# Altium PCB pull_test.PcbDoc
Units mm, origin at the board's own origin, x right, y up, seen from the top; angles counter-clockwise.
Board outline 80 x 60.1 mm, 2 copper layers (Top Layer, Bottom Layer); 72 components, 42 nets, 316 pads, 79 vias.
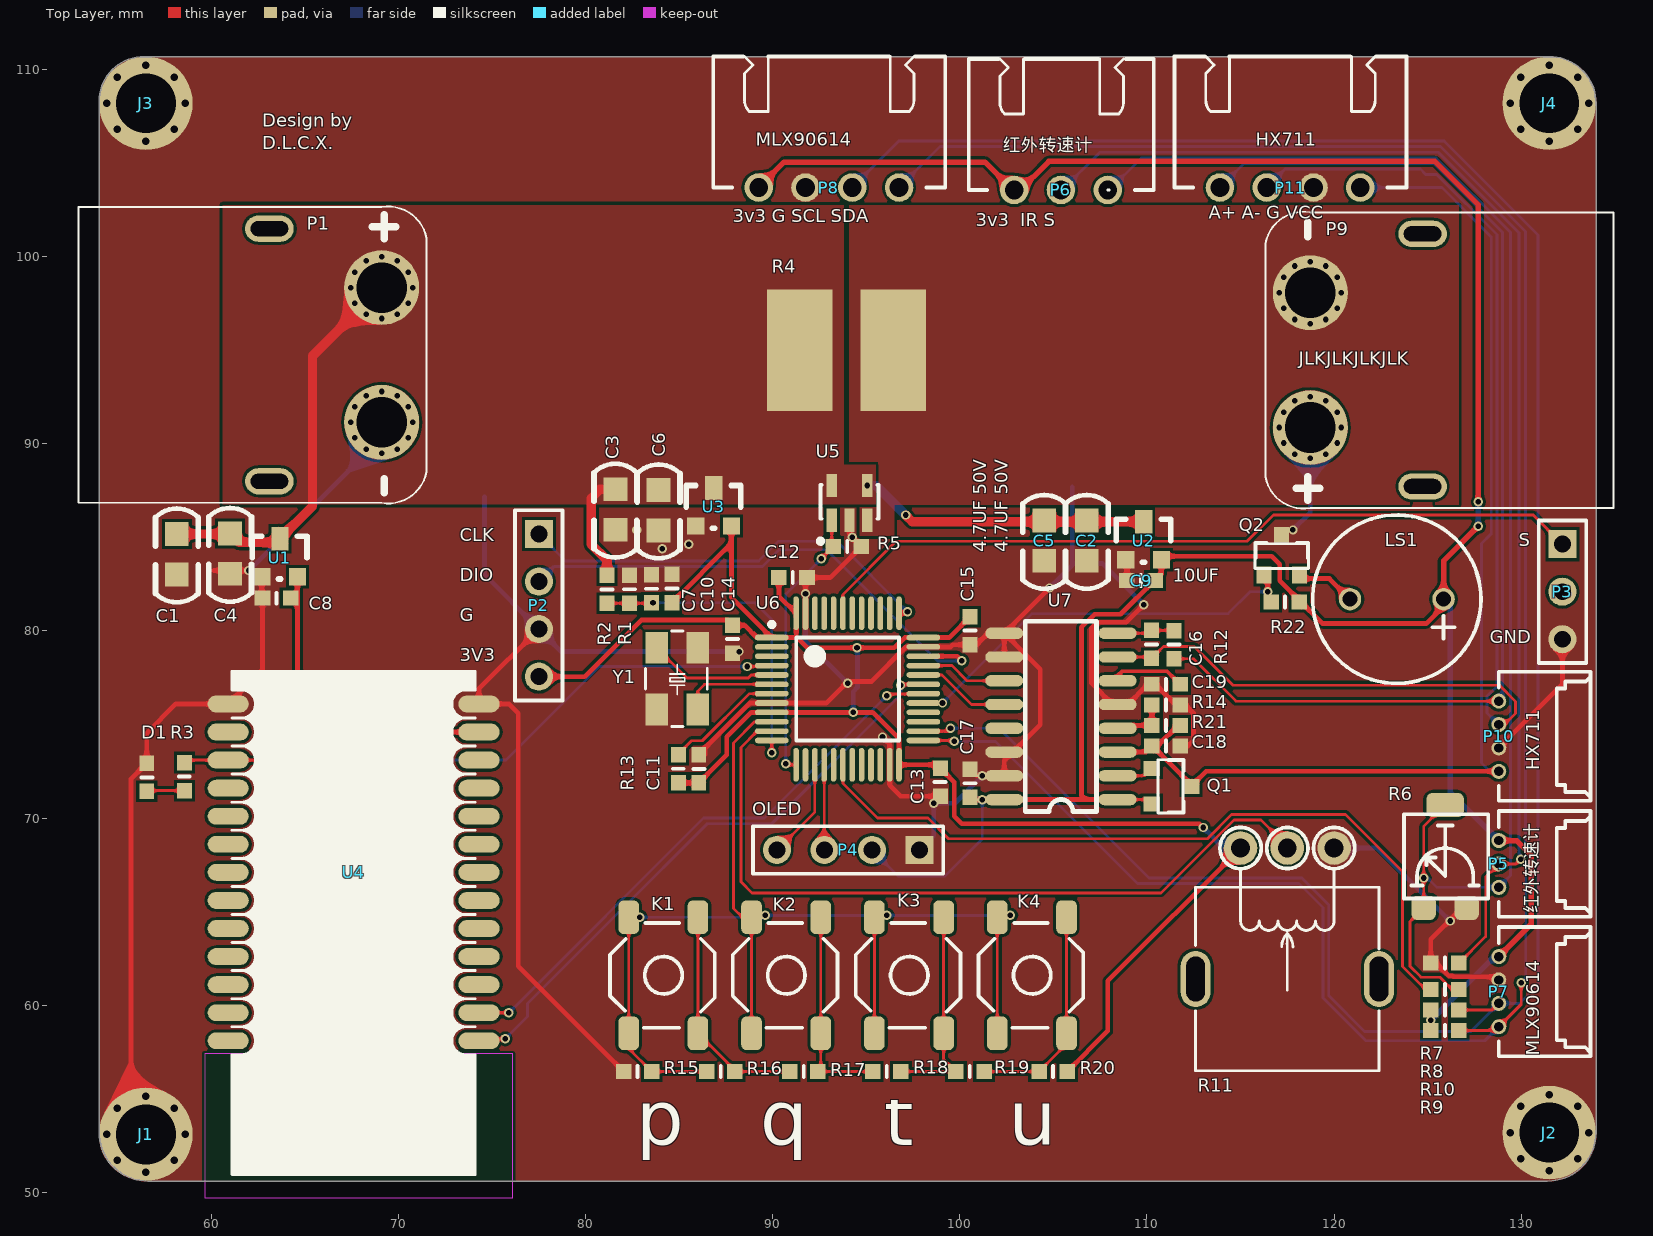
[diagram p0: Top Layer view]
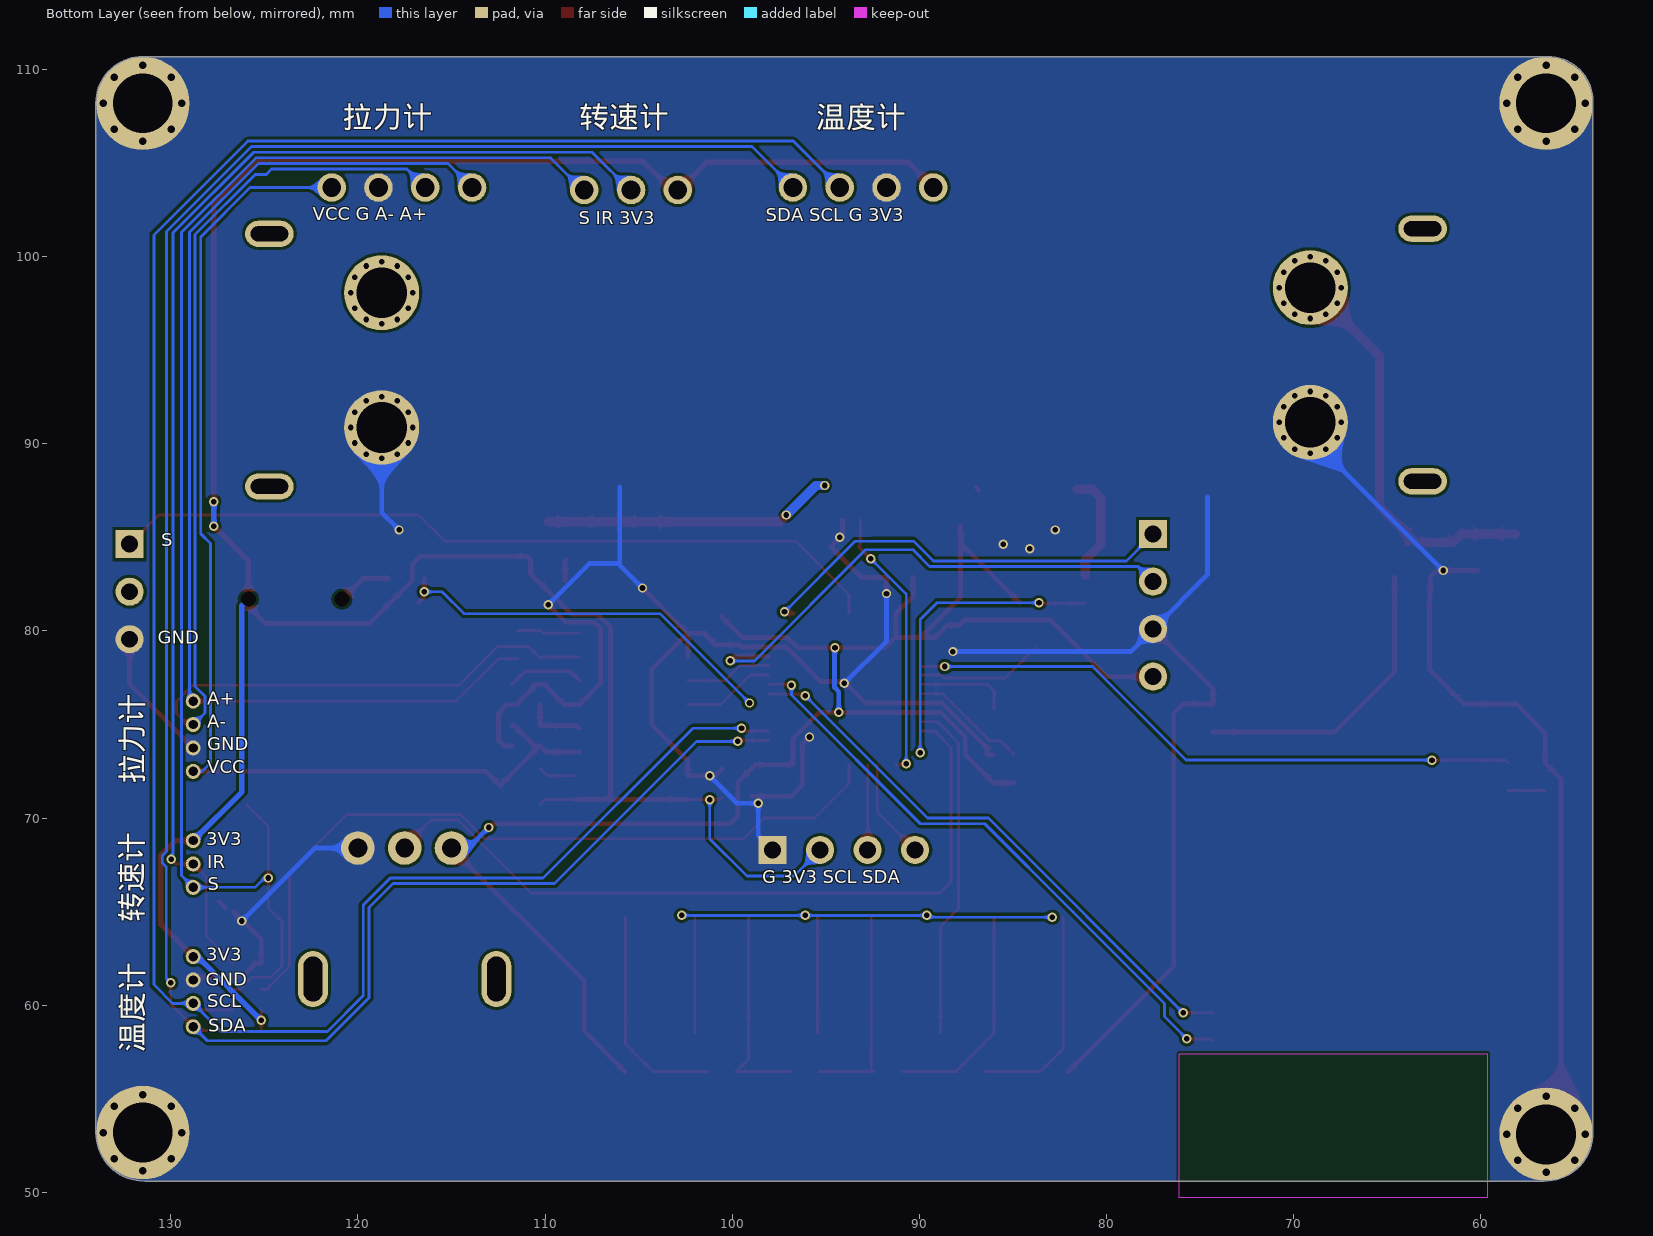
[diagram p1: Bottom Layer view, seen from below]
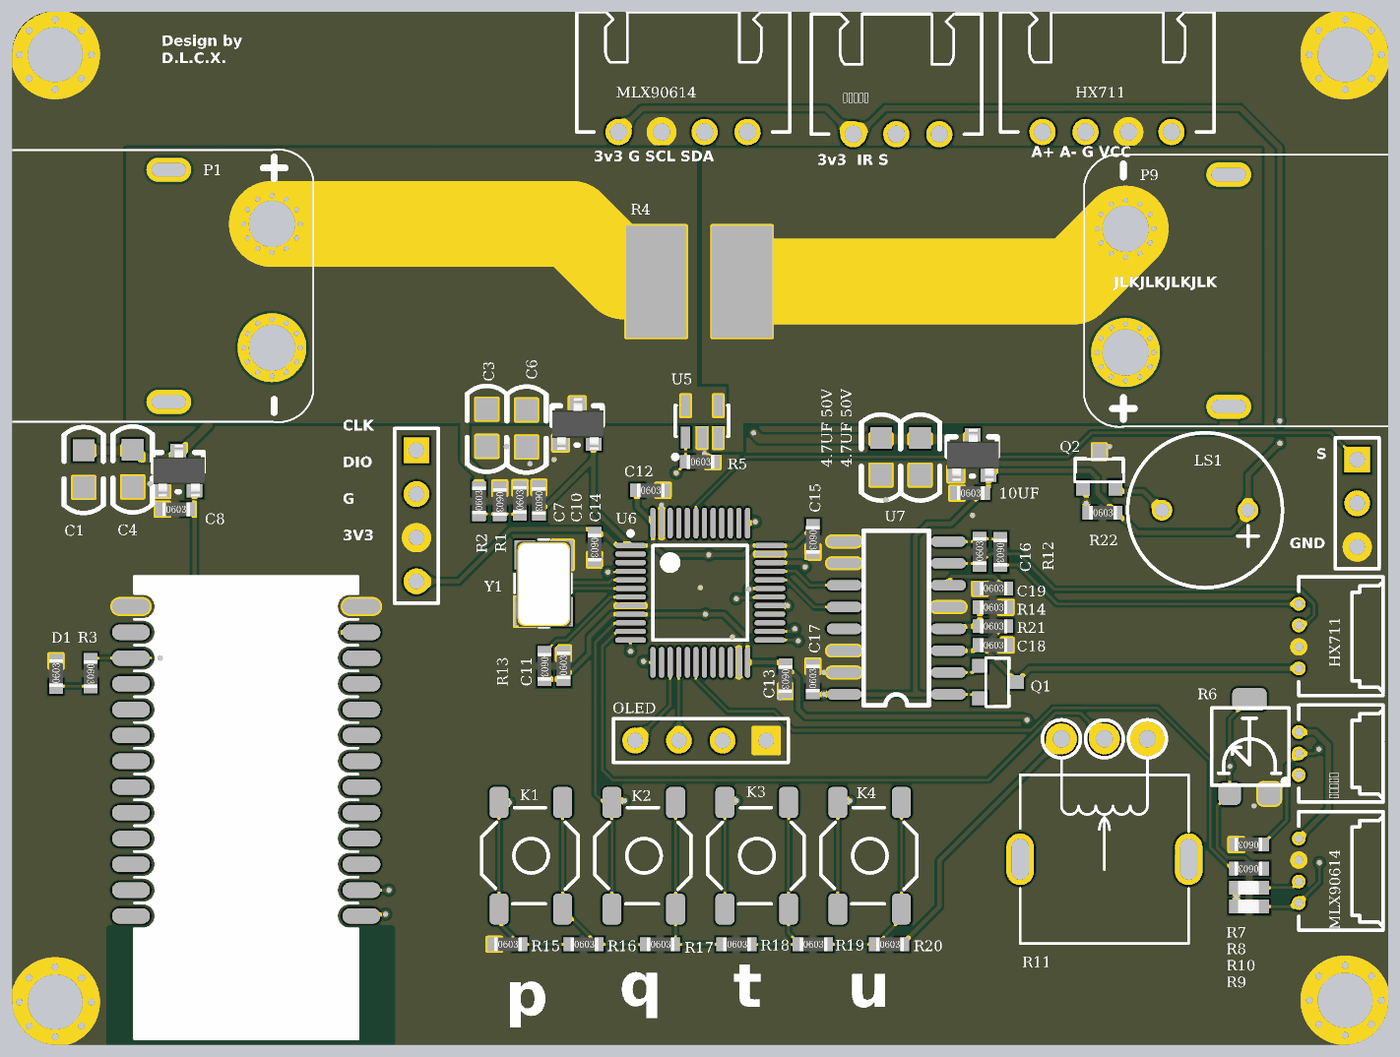
[diagram p2: 3D render of the assembled board from above, using the file's embedded part models]

## Layer stack, top to bottom
Top Solder: solder mask 0.0102, Solder Resist, Dk 3.5
Top Layer: signal copper 0.0356
Dielectric 1: dielectric 0.32, FR-4, Dk 4.8
Bottom Layer: signal copper 0.0356
Bottom Solder: solder mask 0.0102, Solder Resist, Dk 3.5

## Board outline
56.4,110.7 131.5,110.7 cw(c131.5,108.2) 134,108.2 134,53.2 cw(c131.4,53.2) 131.4,50.6 56.6,50.6 cw(c56.6,53.2) 54,53.2 54,108.3 cw(c56.4,108.3)

## Design rules (kind name [scope] priority, off if disabled: settings)
Clearance [All] p1: gap=0.15 ignorepadtopadclearanceinfootprint=FALSE
ComponentClearance [All] p1: gap=0 collisioncheckmode=3 verticalgap=0 showdistances=FALSE
PolygonConnect [All] p1: connectstyle=Direct reliefconductorwidth=0.254 reliefentries=4 polygonreliefangle="90 Angle" airgapwidth=0.254
RoutingVias [All] p1: holewidth=0.711 width=1.27 viastyle="Through Hole" minholewidth=0.3 minwidth=0.5 maxholewidth=0.711 maxwidth=1.27
ShortCircuit [All] p1: allowed=TRUE
SolderMaskExpansion [All] p1: expansion=0.102
UnRoutedNet [All] p1: checkbadconnections=TRUE
Width [All] p1: maxlimit=5 minlimit=0.15 preferedwidth=0.15
27 further rules are at their usual default settings.

## Components (designator, comment, footprint, x,y, rotation, side; value= is the part's Value field where it differs from the comment)
C1 "4.7UF 50V" 0805C 58.027,83.021 r90 top
C2 "4.7UF 50V" 0805C 106.655,83.747 r90 top
C3 "4.7UF 50V" 0805C 81.465,85.412 r90 top
C4 "4.7UF 50V" 0805C 60.873,83.056 r90 top
C5 "4.7UF 50V" 0805C 104.384,83.747 r90 top
C6 "4.7UF 50V" 0805C 83.773,85.372 r90 top
C7 "0.1UF" 0603 83.568,82.177 r90 top
C8 "10UF" 0603 63.4,81.7 r0 top
C9 "10UF" 0603 109.6,82.64 r0 top
C10 "10UF" 0603 84.571,82.352 r270 top
C11 "0.1UF" 0603 86.1,72.55 r90 top
C12 "0.1UF" 0603 91,82.8 r0 top
C13 "0.1UF" 0603 98.9,72 r270 top
C14 "0.1UF" 0603 87.8,79.65 r270 top
C15 "0.1UF" 0603 100.5,80.1 r270 top
C16 "0.1UF" 0603 110.3,79.2 r90 top
C17 "1UF" 0603 100.6,71.792 r90 top
C18 "1UF" 0603 110.935,73.8 r0 top
C19 "1UF" 0603 110.935,77.1 r0 top
D1 "LED2" 0603 56.6,72.1 r90 top
J1 "PAD" PAD 56.5,53.1 r0 top
J2 "PAD" PAD 131.5,53.194 r0 top
J3 "PAD" PAD 56.5,108.2 r0 top
J4 "PAD" PAD 131.5,108.2 r0 top
K1 "BUTTON" 金属轻触开关 86,58.5 r90 top locked
K2 "BUTTON" 金属轻触开关 92.567,58.5 r90 top locked
K3 "BUTTON" 金属轻触开关 99.133,58.5 r90 top locked
K4 "BUTTON" 金属轻触开关 105.7,58.5 r90 top locked
LS1 "Speaker" 0905蜂鸣器 123.35,81.7 r180 top locked
P1 "Header 2" XT60-90 69.1,94.75 r270 top locked
P2 "SWI" HDR1X4 77.5,85.18 r270 top
P3 "电调" HDR1X3 132.2,84.64 r270 top
P4 "OLED" HDR1X4 97.84,68.3 r180 top
P5 "红外转速计" 1.25弯针-3p 128.8,68.8 r270 top locked
P6 "红外转速计" XH2.54-3P 100.868,103.568 r0 top
P7 "MLX90614" 1.25弯针-4p 128.8,62.6 r270 top locked
P8 "MLX90614" XH2.54-4P 87.218,103.7 r0 top
P9 "Header 2" XT60-90 118.73,94.474 r90 top locked
P10 "HX711" 1.25弯针-4p 128.8,76.25 r270 top locked
P11 "HX711" XH2.54-4P 111.868,103.7 r0 top
Q1 "S8550 PNP" SOT23-3 111.255,71.7 r270 top
Q2 "S8550 PNP" SOT23-3 117.2,84 r0 top
R1 "5K" 0603 82.292,82.302 r270 top value=10K
R2 "50K" 0603 81.192,82.145 r90 top value=10K
R3 "470" 0603 58.5,72.3 r270 top value=10K
R4 "0.0005R" 2725-RES 93.933,95 r180 top value=1K
R5 "100K" 0603 93.9,84.46 r0 top value=1K
R6 "5K" 可调精密电阻 123.036,62.7 r0 top
R7 "1K" 0603 126,62.3 r180 top value=10K
R8 "1K" 0603 126,60.9 r180 top value=10K
R9 "2.2K" 0603 126,58.7 r180 top value=10K
R10 "2.2K" 0603 126,59.8 r180 top value=10K
R11 "5K" 0932立式电位器 122.4,66.3 r180 top locked
R12 "1K" 0603 111.4,79.35 r270 top value=10K
R13 "100K" 0603 84.9,72.712 r270 top
R14 "8.2K" 0603 110.935,76 r0 top value=10K
R15 "10K" 0603 82.7,56.4 r0 top
R16 "10K" 0603 87.14,56.4 r0 top
R17 "10K" 0603 91.58,56.4 r0 top
R18 "10K" 0603 96.02,56.4 r0 top
R19 "10K" 0603 100.46,56.4 r0 top
R20 "10K" 0603 104.9,56.4 r0 top
R21 "20K" 0603 110.935,74.9 r0 top value=10K
R22 "10K" 0603 117.3,81.5 r0 top
U1 "ME6203" SOT-23 62.695,82.9 r0 top
U2 "ME6203" SOT-23 108.865,83.808 r0 top
U3 "ME6203" SOT-23 85.885,85.615 r0 top
U4 "HC-06" HC06/HC05 60.9,76.1 r270 top locked
U5 "IN139 电流检测" SOT23-5 93.465,87.916 r0 top
U6 "STM32F103C8T6" STM-LQFP48_N 94,76.9 r0 top locked
U7 "HX711" SOP-16 108.431,70.99 r180 top
Y1 "XTAL" 5032晶振 83,80.1 r270 top locked

## Footprints (in the part's own frame and the unit in brackets; to place one, negate y for a bottom-side part, rotate by r counter-clockwise, add the part's x,y. Pads: shape width x height; smd on the part's side, far side on the other; paste and mask are expansions set on the pad)
1.25弯针-3p [mm]
  round 0.8 hole 0.5 paste+0: 1(0,0) 2(1.25,0) 3(2.5,0)
  silkscreen extent -1.58,0 4.08,4.9
1.25弯针-4p [mm]
  round 0.8 hole 0.5 paste+0: 1(0,0) 2(1.25,0) 3(2.5,0) 4(3.75,0)
  silkscreen extent -1.58,0 5.33,4.9
0603 [mm]
  rect 0.83x0.8 smd paste+0: 1(-0.669,0.054) 2(0.831,0.054)
  silkscreen extent 0.08,-0.25 0.08,0.35, body extent -0.67,-0.35 0.93,0.45, height 0.45
0805C [mil]
  rect 50x50 smd: 1(0,-5) 2(85,-5)
  silkscreen extent -59,-50 139,40
0905蜂鸣器 [mm]
  round 1.2 / inner round 0.5 / far side round 0.5 hole 0.8 paste+0: 1(-2.5,0) 2(2.5,0)
  silkscreen extent -4.5,-4.5 4.5,4.5
0932立式电位器 [mm]
  round 1.8 hole 1 paste+0: 1(2.4,-2.1) 2(4.9,-2.1) 3(7.4,-2.1)
  oval 1.6x3 hole 1 slot 2.4 at 90 deg paste+0: GND(0,4.9) GND(9.8,4.9)
  silkscreen extent 0,-3.2 9.8,9.8
2725-RES [mm]
  rect 3.5x6.5 smd: 1(-2.5,0) 2(2.5,0)
5032晶振 [mm] "5.0 x 3.2 x 0.9 mm"
  rect 1.7x1.2 smd: 1(1,0.8) 2(4.3,0.8) 3(4.3,3) 4(1,3)
  silkscreen extent 0.1,0.2 5.2,3.5, body extent 0.2,0.3 5.2,3.5, height 1
HC06/HC05 [mm]
  oval 0.9x2.2 smd: 1(18,13.4) 2(16.5,13.4) 3(15,13.4) 4(13.5,13.4) 5(12,13.4) 6(10.5,13.4) 7(9,13.4) 8(7.5,13.4) 9(6,13.4) 10(4.5,13.4) 11(3,13.4) 12(1.5,13.4) 13(0,13.4) 22(0,0) 23(1.5,0) 24(3,0) 25(4.5,0) 26(6,0) 27(7.5,0) 28(9,0) 29(10.5,0) 30(12,0) 31(13.5,0) 32(15,0) 33(16.5,0) 34(18,0)
  silkscreen extent -1.75,0.2 25.15,13.2
HDR1X3 [mm] "Connector; Header; 3 Position"
  rect 1.5x1.5 hole 0.9: 1(0,0)
  round 1.5 hole 0.9: 2(2.54,0) 3(5.08,0)
  silkscreen extent -1.27,-1.27 6.35,1.27
HDR1X4 [mm] "Connector; Header; 4 Position"
  rect 1.5x1.5 hole 0.9: 1(0,0)
  round 1.5 hole 0.9: 2(2.54,0) 3(5.08,0) 4(7.62,0)
  silkscreen extent -1.27,-1.27 8.89,1.27
PAD [mm]
  round 5 hole 3.2: 1(0,0)
SOP-16 [mil]
  oval 80x24 smd: 1(0,0) 2(0,-50) 3(0,-100) 4(0,-150) 5(0,-200) 6(0,-250) 7(0,-300) 8(0,-350) 9(238.5,-350) 10(238.5,-300) 11(238.5,-250) 12(238.5,-200) 13(238.5,-150) 14(238.5,-100) 15(238.5,-50) 16(238.5,0)
  silkscreen extent 44,-375 194,25
SOT23-3 [mm]
  rect 0.8x0.9 smd: 1(-0.95,-1) 2(0.95,-1) 3(0,1.1)
  silkscreen extent -1.42,-0.66 1.42,0.7
SOT23-5 [mm]
  rect 0.55x1.25 smd: 1(-0.315,-1.991) 2(0.635,-1.991) 3(1.585,-1.991) 4(1.585,-0.141) 5(-0.315,-0.141)
  silkscreen extent -1.04,-3.24 2.19,-0.12, body extent -0.85,-2.4 2.05,0.4, height 0.25
SOT-23 [mil]
  rect 36x36 smd: 1(0,0) 2(75,0)
  rect 36x50 smd: 3(38,80)
  silkscreen extent -20,-5 95,85, body extent -20,-16 98,102, height 39
STM-LQFP48_N [mm] "QFP, 48-Leads, Body 7x7mm, Pitch 0.5mm, IPC Medium Density"
  oval 1.8x0.3 smd: 1(-4.05,2.75) 2(-4.05,2.25) 3(-4.05,1.75) 4(-4.05,1.25) 5(-4.05,0.75) 6(-4.05,0.25) 7(-4.05,-0.25) 8(-4.05,-0.75) 9(-4.05,-1.25) 10(-4.05,-1.75) 11(-4.05,-2.25) 12(-4.05,-2.75) 25(4.05,-2.75) 26(4.05,-2.25) 27(4.05,-1.75) 28(4.05,-1.25) 29(4.05,-0.75) 30(4.05,-0.25) 31(4.05,0.25) 32(4.05,0.75) 33(4.05,1.25) 34(4.05,1.75) 35(4.05,2.25) 36(4.05,2.75)
  oval 0.3x1.8 smd: 13(-2.75,-4.05) 14(-2.25,-4.05) 15(-1.75,-4.05) 16(-1.25,-4.05) 17(-0.75,-4.05) 18(-0.25,-4.05) 19(0.25,-4.05) 20(0.75,-4.05) 21(1.25,-4.05) 22(1.75,-4.05) 23(2.25,-4.05) 24(2.75,-4.05) 37(2.75,4.05) 38(2.25,4.05) 39(1.75,4.05) 40(1.25,4.05) 41(0.75,4.05) 42(0.25,4.05) 43(-0.25,4.05) 44(-0.75,4.05) 45(-1.25,4.05) 46(-1.75,4.05) 47(-2.25,4.05) 48(-2.75,4.05)
  silkscreen extent -4.17,-2.75 2.75,3.57, body extent -3.5,-3.5 3.5,3.5, height 1.6
XH2.54-3P [mil]
  round 60 hole 39.37 paste+0: 1(80,0) 2(178.43,0) 3(276.85,0)
  silkscreen extent -16,0 374,276
XH2.54-4P [mil]
  round 60 hole 39.37 paste+0: 1(80,0) 1(80,0) 2(178.43,0) 3(276.85,0) 4(375.28,0)
  silkscreen extent -16,0 472,276
XT60-90 [mm]
  round 0.5 hole 0.3 mask+0: 1(-5.251,0) 1(-5.03,-0.826) 1(-5.03,0.825) 1(-4.426,-1.43) 1(-4.426,1.43) 1(-3.6,-1.651) 1(-3.6,1.651) 1(-2.775,1.43) 1(-2.775,-1.43) 1(-2.17,-0.826) 1(-2.17,0.825) 1(-1.949,0) 2(1.949,0) 2(2.17,-0.825) 2(2.17,0.826) 2(2.775,1.43) 2(2.775,-1.43) 2(3.6,-1.651) 2(3.6,1.651) 2(4.426,-1.43) 2(4.426,1.43) 2(5.03,-0.825) 2(5.03,0.826) 2(5.251,0)
  round 4 hole 2.7 mask+0: 1(-3.6,0) 2(3.6,0)
  oval 1.4x2.6 hole 0.8 slot 2 at 90 deg mask+0: 3(6.75,-6) 4(-6.75,-6)
  silkscreen extent -7.93,-16.2 7.93,2.4
可调精密电阻 [mm] "4.5*4.5*2.55"
  rrect50% 1.3x1.3 smd paste+0: 1(4.05,2.5) 3(1.75,2.5)
  rrect50% 2x1.3 smd paste+0: 2(2.9,8)
  round 0.6 on Top Overlay paste+0: ""(5,3.2)
  silkscreen extent 0.7,3 5.2,7.5, body extent 0.65,3.05 5.15,7.55, height 2.55
金属轻触开关 [mm] "4*4*1.5/3.0MM金属开关"
  rrect50% 1.8x1.1 smd paste+0: 1(0,0) 1(6.2,0) 2(0,3.7) 2(6.2,3.7)
  silkscreen extent 0.3,-0.9 5.9,4.7

## Part data
C1 C2 C3 C4 C5 C6: library part Cap, "0805 50v 4.7uf", LatestRevisionDate=17-Jul-2002, LatestRevisionNote="Re-released for DXP Platform.", PackageDescription="Radial Cap, Thru-Hole; 2 Leads; 0.3 in Pin Spacing", PackageReference=RAD-0.3, Published=8-Jun-2000, Publisher="Altium Limited"
C7 C11 C12 C13 C14 C15 C16 C17 C18 C19: library part Cap, "电容", LatestRevisionDate=17-Jul-2002, LatestRevisionNote="Re-released for DXP Platform.", PackageDescription="Radial Cap, Thru-Hole; 2 Leads; 0.3 in Pin Spacing", PackageReference=RAD-0.3, Published=8-Jun-2000, Publisher="Altium Limited"
C8 C9 C10: library part Cap, "Capacitor", LatestRevisionDate=17-Jul-2002, LatestRevisionNote="Re-released for DXP Platform.", PackageDescription="Radial Cap, Thru-Hole; 2 Leads; 0.3 in Pin Spacing", PackageReference=RAD-0.3, Published=8-Jun-2000, Publisher="Altium Limited"
D1: "Typical RED, GREEN, YELLOW, AMBER GaAs LED", LatestRevisionDate=17-Jul-2002, LatestRevisionNote="Re-released for DXP Platform.", PackageDescription="SM LED; 2 Flat Leads", PackageReference=3.2X1.6X1.1, PackageVersion=Feb-2002, Published=8-Jun-2000, Publisher="Altium Limited"
LS1: "Loudspeaker", LatestRevisionDate=17-Jul-2002, LatestRevisionNote="Re-released for DXP Platform.", PackageReference=PIN2, Published=24-Mar-1999, Publisher="Altium Limited"
P1 P9: "Header, 2-Pin", LatestRevisionDate=17-Jul-2002, LatestRevisionNote="Re-released for DXP Platform.", Publisher="Altium Limited"
P2 P4 P7 P8 P10 P11: library part "Header 4", "Header, 4-Pin", LatestRevisionDate=17-Jul-2002, LatestRevisionNote="Re-released for DXP Platform.", Publisher="Altium Limited"
P3 P5 P6: library part "Header 3", "Header, 3-Pin", LatestRevisionDate=17-Jul-2002, LatestRevisionNote="Re-released for DXP Platform.", Publisher="Altium Limited"
R1 R2 R3 R7 R8 R9 R10 R12 R14 R15 R16 R17 R18 R19 R20 R21 R22: library part Res3, "Resistor", LatestRevisionDate=29-May-2009, LatestRevisionNote="IPC-7351 Footprint Added.", PackageDescription="Chip Resistor", PackageReference=J1-0603, Published=8-Jun-2000, Publisher="Altium Limited"
R4 R5: library part "Res Semi", "Semiconductor Resistor", LatestRevisionDate=17-Jul-2002, LatestRevisionNote="Re-released for DXP Platform.", PackageDescription="Axial Device, Thru-Hole; 2 Leads; 0.5 in Pin Spacing", PackageReference=AXIAL-0.5, Published=8-Jun-2000, Publisher="Altium Limited"
R6 R11: library part "RPot SM", "立式圆轴梅花柄", ComponentLink1Description="Manufacturer Link", ComponentLink1URL=http://bourns.com/2/search.html, DatasheetVersion=Oct-2003, PackageDescription="Square Trimming Potentiometer", PackageReference=POT4MM-2, Published=17-Dec-2003, Publisher="Altium Limited"
R13: library part Res2, "Resistor", LatestRevisionDate=17-Jul-2002, LatestRevisionNote="Re-released for DXP Platform.", PackageDescription="Axial Device, Thru-Hole; 2 Leads; 0.4 in Pin Spacing", PackageReference=AXIAL-0.4, Published=8-Jun-2000, Publisher="Altium Limited"
U1 U2 U3: "3.3-40v供电范围，100ma负载能力", ComponentLink1Description=DATASHEET, ComponentLink1URL=E:\芯片资料\LOD\ME6203_CMOS低压差稳压
U5: "德州仪器，电流检测"
U6: "ARM Cortex-M3 32-bit MCU, 64 KB Flash, 20 KB Internal RAM, 37 I/Os, 48-pin LQFP, -40 to 85 degC, Tray", I/Os (High Current)=37, Operating Frequency(F) (Processor speed) (MHz)=72, Supplier Part Number 1=497-6063-ND, Supply Voltage(Vcc) min (V)=2, A/D Converter="2x12-bit (10 Channel)", ComponentLink1Description="Manufacturer URL", ComponentLink1URL=http://www.st.com/web/en/home.html, ComponentLink2Description=Datasheet, ComponentLink2URL=http://www.st.com/st-web-ui/static/active/en/resource/technical/document/datasheet/CD00161566.pdf, ComponentLink3Description="Package Specification", ComponentLink3URL=http://www.st.com/st-web-ui/static/active/en/resource/technical/document/datasheet/DM00058181.pdf, Core="ARM Cortex-M3", DatasheetVersion="Rev. 16", FLASH Size (Prog) (kB)=64, Internal RAM Size (kB)=20, Mounting Technology="Surface Mount", PackageDescription="48-Pin Low Profile Quad Flat Package, 7 x 7 mm Body, 0.5 mm Pitch", PackageReference=LQFP48, PackageVersion="Rev. 6, 06/2013", Packing=Tray, PartNumber=STM32F103C8T6, Supplier 1=Digi-Key, Supplier 2=Farnell, Supplier 3=Newark, Supplier 4=Newark, Supplier 5=Mouser, Supplier Part Number 2=1447637, Supplier Part Number 3=59M2182, Supplier Part Number 4=57P1222, Supplier Part Number 5=511-STM32F103C8T6
U7: library part HX711电子秤, "HX711电子秤放大器"
Y1: library part 5032晶振

## Via types
v1: diameter 0.5, hole 0.3, Top Layer to Bottom Layer, tented both sides, 47 vias
v2: diameter 0.5, hole 0.4, Top Layer to Bottom Layer, 32 vias

## Nets (pads, with @x,y where several pads share a name; then routed paths per layer and width w, separated by ;. In a path a pad name is that pad's centre, name@x,y a point inside that pad or via, vN(x,y) a via of type N, cw(c..) or ccw(c..) an arc to the next point about the centre after c; other vN are vias at no path point)
ADC_KEY: K1.2 K2.2 K3.2 K4.2 R15.2 R16.1 U6.10 | length 62.4
  Top Layer w0.15: K1.2@82.3,64.7 82.3,58.5 82.3,57.685 R15.2 R16.1 ; K2.2@88.867,58.5 88.867,64.2 87.896,65.171 87.896,74.021 89.025,75.15 U6.10 ; K3.2@95.433,58.5 K3.2@95.433,64.7 ; K4.2@102,58.5 K4.2@102,64.7
  Bottom Layer w0.15: v1(82.9,64.7) 89.5,64.7 v1(89.6,64.8) v1(96.1,64.8) v1(102.7,64.8)
BAT: C1.2 C2.2 C3.2 C4.2 C5.2 C6.2 P1.1 R2.2 R4.2 U1.3 U2.3 U3.3 U5.4 U5.5 | length 43.7
  Top Layer w0.254: U1.3@63.459,84.731 U1.3 U1.3@63.961,84.631 ; U3.3@86.816,87.531 U3.3@86.954,87.669
  Top Layer w0.5: C1.2 60.965,85.18 C4.2 61.484,84.731 U1.3@63.459,84.731 ; U1.3 65.4,86.672 65.4,94.7 P1.1@69.075,98.375 ; R2.2 81.138,83.788 80.3,84.626 80.3,87.1 80.771,87.571 C3.2 ; v1(97.1,86.2) 97.46,85.84 U2.3
  Bottom Layer w0.5: v1(95.05,87.775) 95.525,87.775 v1(97.1,86.2)
BAT_OUT: P9.2 R4.1 U5.3
BEEP: Q2.1 R22.1 U6.29 | length 21.2
  Top Layer w0.254: Q2.1@116.45,82.8 v1(116.45,82.1) 116.45,81.835 R22.1@116.731,81.554
  Bottom Layer w0.15: v1(99.073,76.15) 103.848,80.925 114.325,80.925 115.5,82.1 v1(116.45,82.1)
CUR: R5.1 U5.1 U6.13 | length 14.7
  Top Layer w0.15: v1(90.7,72.9) 90.75,72.85 U6.13 ; v1(92.6,83.869) 93.231,84.5 R5.1 93.15,84.595 U5.1
  Bottom Layer w0.15: v1(90.7,72.9) 90.7,81.969 v1(92.6,83.869)
GND: C1.1 C2.1 C3.1 C4.1 C5.1 C6.1 C7.2 C8.1 C9.1 C10.1 C11.2 C12.2 C13.2 C14.2 C15.2 C17.2 C18.2 C19.1 D1.2 J1.1 J2.1 J3.1 J4.1 P1.2 P2.3 P3.3 P4.1 P7.2 P8.2 P9.1 P10.3 P11.3 Q2.3 R1.1 R5.2 R6.1 R7.2 R11.1 R14.2 R15.1 U1.1 U2.1 U3.1 U4.13 U4.22 U5.2 U6.8 U6.23 U6.35 U6.47 U7.5 U7.9 U7.10 U7.14 U7.15 Y1.2 Y1.4 | length 213.9
  Top Layer w0.254: J1.1@56.7,53.2 55.7,54.2 55.7,72.085 D1.2 56.546,74.546 58.1,76.1 U4.22 62.731,77.931 C8.1 62.695,81.79 U1.1 62.364,83.231 v1(62,83.231) 60.146,83.231 ; P2.3 74.3,76.9 U4.13 75.9,76.1 76.4,75.6 76.4,62.085 R15.1 ; C11.2 86.381,73.381 86.381,73.752 88.779,76.15 U6.8 92.85,76.15 94,77.3 95.271,77.3 97.121,79.15 U6.35 99.506,79.15 99.625,79.269 C15.2 100.889,79.269 101.5,79.88 U7.9 ; v1(91.75,82) 91.75,82.773 C12.2 93.071,82.854 R5.2 v1(94.245,85) 94.1,85.145 U5.2 ; v1(95.867,74.333) 96.25,73.95 U6.23 96.25,71.75 96.831,71.169 C13.2 ; C17.2 100.909,72.26 v1(101.2,72.26) U7.15 102.373,73.073 104.3,75 104.3,77.953 U7.9 ; U7.10 U7.9 ; v1(104.793,82.3) U7.9 ; U2.1 108.931,83.742 C9.1 ; v1(109.83,81.4) 108.892,80.462 107.333,80.462 107.036,80.164 107.036,77.201 108.167,76.07 U7.5 108.97,76.07 110.054,77.154 C19.1 110.446,77.154 111.546,76.054 R14.2 112.046,76.054 112.481,75.619 112.481,74.147 112.188,73.854 C18.2 ; P9.1@118.73,89.223 P9.1@118.73,90.874 ; R11.1 R11.1@120.224,68.4 ; R6.1@126.65,65 125.169,63.519 R7.2 125.462,62.246 126.139,61.569 126.336,61.569 126.382,61.523 P7.2@128.596,61.523 ; R6.1 R6.1@127.436,65.55 ; P10.3 132.2,77.15 P3.3
  Bottom Layer w0.254: v1(62,83.231) P1.2@68.382,89.613 ; 74.6,87.172 74.6,83 P2.3 78.7,78.9 v1(88.2,78.9) ; v1(91.75,82) 91.75,79.45 v1(94,77.2) ; P4.1 98.6,69.06 v1(98.6,70.8) 99.74,70.8 v1(101.2,72.26) ; v1(104.793,82.3) 106,83.507 106,87.7 ; 106.093,83.6 107.63,83.6 v1(109.83,81.4) ; v1(117.8,85.4) 118.73,86.33 118.73,89.223 P9.1@118.73,90.874 ; P11.3@118.9,103.181 P11.3 ; R11.1 122.3,68.4 v1(126.2,64.5) ; J2.1 v2(131.5,55.226)
  other v1: 84.1,84.4 85.504,84.64 82.735,85.4
  other v2: 56.5,51.068 131.5,51.162 54.976,51.703 58.024,51.703 129.976,51.797 133.024,51.797 54.415,53.094 58.606,53.094 129.415,53.188 133.606,53.188 54.976,54.497 58.024,54.497 129.976,54.591 133.024,54.591 56.5,55.132 56.5,106.168 131.5,106.168 54.976,106.803 58.024,106.803 129.976,106.803 133.024,106.803 54.415,108.194 58.606,108.194 129.415,108.194 133.606,108.194 54.976,109.597 58.024,109.597 129.976,109.597 133.024,109.597 56.5,110.232 131.5,110.232
HC_3V3: C8.2 U1.2 U4.12 | length 16.1
  Top Layer w0.254: U1.2 64.6,77.831 67.831,74.6 U4.12
HC_STATE: R3.1 U4.24 U6.4 | length 33.6
  Top Layer w0.15: R3.1 58.685,73.1 U4.24 v1(62.6,73.1) ; v1@88.608,78.1 v1(88.632,78.1) 89.9,78.1 U6.4
  Bottom Layer w0.15: v1(62.6,73.1) 75.748,73.1 80.748,78.1 v1(88.632,78.1)
IR: R8.2 U6.18 | length 41
  Top Layer w0.15: U6.18 93.75,71.85 95.6,70 98.3,70 99.4,68.9 113.225,68.9 114.525,70.2 120.6,70.2 123.654,67.146 123.654,62.067 124.876,60.846 R8.2
MCU_3V3: C10.2 C11.1 C12.1 C13.1 C14.1 C15.1 P2.4 R11.3 R13.2 R20.2 U3.2 U6.1 U6.9 U6.24 U6.36 U6.48 | length 96.9
  Top Layer w0.254: P2.4 79.949,77.56 82.973,80.584 87.585,80.584 C14.1@87.85,80.319 ; C10.2 87.79,84.686 ; R13.2 C11.1 87.544,73.379 87.544,74.344 88.85,75.65 U6.9 v1(94.3,75.65) 94.796,75.65 ; U3.2 87.79,84.686 ; C14.1 88.194,80.319 88.175,80.3 88.5,80.3 89.15,79.65 U6.1 ; C12.1 90.331,81.869 U6.48 91.25,79.7 91.85,79.1 v1(94.5,79.1) 96.5,79.1 97.05,79.65 U6.36 99.435,79.65 C15.1 ; 91.2,79.65 U6.1 ; 94.8,75.654 94.796,75.65 ; R20.2 107.9,58.623 107.9,61.3 R11.3 ; v1(113,69.5) 112.8,69.7 100.1,69.7 99.7,70.1 99.7,71.923 C13.1 98.773,72.85 U6.24 96.75,74.25 95.35,75.65 94.796,75.65 ; 87.79,84.686 87.79,81.81 U6.1
  Bottom Layer w0.254: v1(94.3,75.65) 94.3,76.755 94.527,76.982 94.527,79.073 v1(94.5,79.1) ; v1(113,69.5) 114.1,68.4 R11.3
MLX_SCL: P7.3 P8.3 R10.1 U6.26 | length 125.6
  Top Layer w0.15: U6.26 99.35,74.65 v1(99.5,74.8) ; R10.1 128.446,59.746 P7.3
  Bottom Layer w0.15: P8.3 96.737,106.187 125.883,106.187 130.9,101.17 130.9,61.1 129.9,60.1 P7.3 127.3,58.6 121.624,58.6 119.712,60.512 119.712,65.358 118.271,66.8 110.1,66.8 102.1,74.8 v1(99.5,74.8)
MLX_SDA: P7.4 P8.4 R9.1 U6.25 | length 122.3
  Top Layer w0.15: U6.25 99.65,74.15 v1(99.7,74.1) ; R9.1 128.596,58.646 P7.4 130,60.05 v1(130,61.2)
  Bottom Layer w0.15: P8.4 98.937,105.887 125.693,105.887 130.224,101.356 130.224,68.224 130.451,67.997 130.451,67.603 130.244,67.396 130.244,61.444 v1(130,61.2) ; v1(99.7,74.1) 101.9,74.1 109.5,66.5 118.13,66.5 119.4,65.23 119.4,60.4 121.7,58.1 128.05,58.1 P7.4
MOTO: P3.1 U6.43 | length 41.9
  Top Layer w0.15: U6.43 93.75,81.95 96.6,84.8 115.36,84.8 116.76,86.2 130.64,86.2 P3.1
NetC16_1: C16.1 P10.2 P11.2 U7.7 | length 65.7
  Top Layer w0.15: U7.7@108.158,78.61 U7.7 110.167,78.61 C16.1 110.886,79.171 112.529,79.171 114.6,77.1 128.834,77.1 129.7,76.234 129.7,75.6 129.1,75 P10.2
  Bottom Layer w0.15: P11.2 117.387,104.687 124.613,104.687 124.9,104.4 125.483,104.4 128.7,101.183 128.7,77.034 128.175,76.509 128.175,75.625 P10.2
NetC16_2: C16.2 R12.1 U7.8 | length 3.4
  Top Layer w0.15: U7.8@108.158,79.88 110.095,79.88 C16.2 111.442,80.031 R12.1
NetC18_1: C18.1 P10.4 P11.4 Q1.3 R21.2 U7.3 | length 61.5
  Top Layer w0.254: U7.3@108.158,73.53 109.942,73.53 C18.1 C18.1@110.293,73.854 ; R21.2 111.659,74.954 110.559,73.854 C18.1@110.293,73.854 ; P10.4 113.155,72.5 Q1.3 112.355,71.792 C18.1@110.293,73.854
  Bottom Layer w0.15: P11.4 125.758,103.7 128.4,101.058 128.4,85.2 127.875,84.675 127.875,72.948 128.323,72.5 P10.4
NetC19_2: C19.2 U7.6 | length 4.1
  Top Layer w0.2: U7.6@108.158,77.34 108.668,77.85 111.07,77.85 C19.2
NetD1_1: D1.1 R3.2 | length 2
  Top Layer w0.15: D1.1 56.584,71.469 R3.2
NetK1_1: K1.1 R16.2 R17.1 | length 12
  Top Layer w0.15: K1.1@86,64.7 86,58.5 87.971,56.529 R16.2 R17.1
NetK2_1: K2.1 R17.2 R18.1 | length 11.3
  Top Layer w0.15: K2.1@92.567,64.7 92.567,58.5 92.567,56.61 R17.2 R18.1
NetK3_1: K3.1 R18.2 R19.1 | length 11.5
  Top Layer w0.15: R18.2 R19.1 99.133,57.112 99.133,58.5 K3.1@99.133,64.7
NetK4_1: K4.1 R19.2 R20.1 | length 11.8
  Top Layer w0.15: R19.2 R20.1 105.7,57.923 105.7,58.5 K4.1@105.7,64.7
NetLS1_2: LS1.2 Q2.2 | length 3
  Top Layer w0.254: Q2.2@118.35,82.8 119.75,82.8 LS1.2
NetP5_2: P5.2 P6.2 R7.1 | length 68.7
  Top Layer w0.15: R7.1 128.1,63.677 128.1,66.85 P5.2 129.726,67.55 v1(129.976,67.8)
  Bottom Layer w0.15: P6.2@104.8,103.568 P6.2 105.468,103.568 107.487,105.587 125.569,105.587 129.876,101.28 129.876,68.124 129.976,68.024 v1(129.976,67.8)
NetP5_3: P5.3 P6.3 R6.2 R6.3 R8.1 | length 76.5
  Top Layer w0.15: R6.2 124.786,69.55 R6.3 124.061,64.475 124.061,62.085 124.646,61.5 125.648,61.5 126.302,60.846 R8.1
  Bottom Layer w0.15: P6.3@107.3,103.568 P6.3 107.981,103.568 109.7,105.287 125.444,105.287 129.425,101.306 129.425,66.925 P5.3 125.5,66.3 125,66.8 v1(124.8,66.8)
NetP10_1: P10.1 P11.1 R12.2 | length 60.8
  Top Layer w0.15: R12.2 112.481,78.519 114.75,76.25 P10.1 P10.1@128.65,76.4
  Bottom Layer w0.15: P11.1@113.9,103.7 115.187,104.987 125.32,104.987 129,101.307 129,76.45 P10.1
NetQ1_1: Q1.1 U7.2 | length 2
  Top Layer w0.15: U7.2 109.865,72.26 Q1.1
NetR13_1: R13.1 U6.7 | length 6.4
  Top Layer w0.15: R13.1 84.954,73.432 85.655,74.133 86.233,74.133 88.75,76.65 U6.7
NetR14_1: R14.1 R21.1 U7.4 | length 3.3
  Top Layer w0.254: U7.4@108.158,74.8 108.312,74.954 R21.1 R14.1
NetU6_5: U6.5 Y1.1 | length 6.9
  Top Layer w0.15: Y1.1 85.412,77.488 88.692,77.488 88.854,77.65 U6.5
NetU6_6: U6.6 Y1.3 | length 5.1
  Top Layer w0.15: Y1.3 86,76.8 86.35,77.15 U6.6
OLED_SCL: P4.3 U6.16 | length 4.6
  Top Layer w0.15: U6.16 92.75,68.31 P4.3
OLED_SDA: P4.4 U6.15 | length 5.4
  Top Layer w0.15: P4.4 92.25,70.33 U6.15
Poten: R11.2 U6.11 | length 41.3
  Top Layer w0.15: U6.11 89.17,74.65 88.3,73.78 88.3,66.6 88.9,66 110.749,66 114.649,69.9 116.1,69.9 117.5,68.5 R11.2 117.5,68.348 R11.2@117.3,68.148
PULL_DAT: U6.32 U7.12 | length 5
  Top Layer w0.15: U6.32 99.05,77.65 100.63,76.07 U7.12
PULL_SCK: U6.33 U7.11 | length 4.7
  Top Layer w0.15: U6.33 99.573,78.15 100.383,77.34 U7.11
SEN_3V3: C9.2 C17.1 LS1.1 P4.2 P5.1 P6.1 P7.1 P8.1 Q1.2 R9.2 R10.2 R22.2 U2.2 U7.1 U7.16 | length 144
  Top Layer w0.15: C17.1 100.679,70.99 v1(101.2,70.99) U7.16 ; U7.1 110.015,70.99 Q1.2 ; R9.2 v1(125.169,59.196) R10.2
  Top Layer w0.254: U7.16 106.71,70.99 ; U7.1 106.71,70.99 ; LS1.1@125.85,81.335 124.915,80.4 119.385,80.4 117.1,82.685 117.1,83.564 116.664,84 110.962,84 U2.2 110.77,83.033 C9.2 110.378,82.694 108.585,80.9 107.2,80.9 106.5,80.2 106.5,71.2 106.71,70.99
  Top Layer w0.3: P8.1@89.25,103.7 90.608,105.058 101.342,105.058 102.866,103.534 103.03,103.37 104.76,105.1 125.386,105.1 127.7,102.786 v1(127.7,86.9) ; LS1.1 125.85,83.75 v1(127.7,85.6) ; P7.1 130.526,64.326 130.526,68.028 129.754,68.8 P5.1
  Bottom Layer w0.15: P4.2 96.7,66.9 99.2,66.9 101.2,68.9 v1(101.2,70.99) ; P7.1@128.573,62.6 P7.1
  Bottom Layer w0.3: v1(125.169,59.196) P7.1@128.573,62.6 ; LS1.1 126.2,81.35 126.2,71.4 P5.1 ; v1(127.7,85.6) v1(127.7,86.9)
SWCLK: P2.1 U6.37 | length 22.8
  Top Layer w0.254: U6.37 97.127,80.95 v1(97.2,81.023)
  Bottom Layer w0.15: P2.1 78.932,83.748 89.248,83.748 90.3,84.8 93.423,84.8 v1(97.2,81.023)
SWDIO: P2.2 U6.34 | length 27.9
  Top Layer w0.254: U6.34 99.85,78.65 v1(100.1,78.4)
  Bottom Layer w0.15: P2.2 78.308,83.448 89.446,83.448 90.342,84.344 92.87,84.344 98.814,78.4 v1(100.1,78.4)
USART_RX: U4.1 U6.31 | length 32.4
  Top Layer w0.15: U4.1 74.4,58.2 v1(75.7,58.2) ; v1(96.831,77.1) 96.881,77.15 U6.31
  Bottom Layer w0.15: v1(75.7,58.2) 76.9,59.4 76.9,60.1 81.791,64.991 86.5,69.7 89.95,69.7 96.831,76.581 v1(96.831,77.1)
USART_TX: U4.2 U6.30 | length 30.8
  Top Layer w0.15: U4.2 v1(75.9,59.6) ; v1(96.096,76.547) 96.175,76.625 98.025,76.625 U6.30
  Bottom Layer w0.15: v1(75.9,59.6) 86.3,70 89.55,70 v1(96.096,76.547)
Voltage: C7.1 R1.2 R2.1 U6.12 | length 16.9
  Top Layer w0.15: R2.1@81.146,81.48 83.514,81.48 C7.1@83.522,81.48 ; v1(89.95,73.5) U6.12
  Bottom Layer w0.15: v1(83.6,81.508) 89.047,81.508 89.95,80.605 v1(89.95,73.5)
pads on no net: P1.3 P1.4 P3.2 P9.3 P9.4 R6. R11.GND U4.3 U4.4 U4.5 U4.6 U4.7 U4.8 U4.9 U4.10 U4.11 U4.23 U4.25 U4.26 U4.27 U4.28 U4.29 U4.30 U4.31 U4.32 U4.33 U4.34 U6.2 U6.3 U6.14 U6.17 U6.19 U6.20 U6.21 U6.22 U6.27 U6.28 U6.38 U6.39 U6.40 U6.41 U6.42 U6.44 U6.45 U6.46 U7.13

## Polygon pours and split planes (outlines as drawn)
GND on Top Layer "Top Layer-GND" (solid, pour order 6): 134,53.1 cw(c131.5,53.1) 131.5,50.6 131.4,50.6 56.5,50.6 56.494,50.6 cw(c56.494,53.094) 54,53.094 54,108.2 cw(c56.5,108.2) 56.5,110.7 131.5,110.7 cw(c131.5,108.2) 134,108.2
BAT_OUT on Top Layer "Top Layer-BAT_OUT" (solid, pour order 4): 96.5,86.75 96.5,85.1 94.65,85.1 94.65,86.765 95.635,86.765 95.65,86.75 95.65,89.04 94.1,89.04 94.1,102.75 126.65,102.75 126.65,86.75
BAT on Top Layer "BAT" (solid, pour order 0): 93.8,88.877 95.5,88.877 95.5,86.765 93.8,86.765 60.6,86.765 60.6,102.765 93.8,102.765
GND on Bottom Layer "Bottom Layer-GND 1" (solid, remove dead copper, pour order 8): 54,53.094 ccw(c56.494,53.094) 56.494,50.6 131.5,50.6 ccw(c131.5,53.1) 134,53.1 134,108.2 ccw(c131.5,108.2) 131.5,110.7 56.5,110.7 ccw(c56.5,108.2) 54,108.2
GND on Bottom Layer "Bottom Layer-GND" (solid, pour order 2): 92.6,86.75 92.6,84.1 95.575,84.1 95.635,84.16 95.635,86.75 126.8,86.75 126.8,102.75 60.9,102.75 60.9,86.75 83.3,86.75 83.2,86.65 83.2,84.4 86.5,84.4 86.7,84.6 86.7,86.75

## Keep-outs
Top Layer:
  rectangle: 59.638,49.7 76.1,57.4
Bottom Layer:
  rectangle: 59.638,49.7 76.1,57.4

## Silkscreen, mask and mechanical layers (free items; w line width, h text height)
Top Overlay:
  text "Design by / D.L.C.X." at 62.731,105.5 h1.2
  text "A+ A- G VCC" at 113.3,101.8 h1.2
  text "3v3 G SCL SDA" at 87.854,101.608 h1.2
  text "3v3  IR S" at 100.85,101.4 h1.2
  text "JLKJLKJLKJLK" at 118.1,94 h1.2
  text "CLK" at 73.26,84.545 h1.2
  text "S" at 129.876,84.3 h1.2
  text "DIO" at 73.26,82.413 h1.2
  text "G" at 73.26,80.282 h1.2
  text "GND" at 128.312,79.1 h1.2
  text "3V3" at 73.26,78.15 h1.2
  text "p" at 82.7,51.588 h5
  text "q" at 89.333,51.588 h5
  text "t" at 95.967,51.588 h5
  text "u" at 102.6,51.588 h5
Bottom Overlay:
  text "温度计" at 95.515,106.5 h2
  text "转速计" at 108.169,106.5 h2
  text "拉力计" at 120.8,106.5 h2
  text "VCC G A- A+" at 122.4,101.7 h1.2
  text "SDA SCL G 3V3" at 98.2,101.653 h1.2
  text "S IR 3V3" at 108.196,101.5 h1.2
  text "S" at 130.5,84.3 h1.2
  text "GND" at 130.7,79.074 h1.2
  text "A+" at 128.05,75.812 h1.2
  text "A-" at 128.05,74.597 h1.2
  text "GND" at 128.05,73.381 h1.2
  text "VCC" at 128.05,72.166 h1.2
  text "拉力计" at 131.1,71.832 h2 r270
  text "3V3" at 128.1,68.3 h1.2
  text "IR" at 128.05,67.088 h1.2
  text "G 3V3 SCL SDA" at 98.388,66.271 h1.2
  text "S" at 128.036,65.9 h1.2
  text "转速计" at 131.129,64.428 h2 r270
  text "3V3" at 128.1,62.127 h1.2
  text "GND" at 128.138,60.8 h1.2
  text "SCL" at 128.05,59.65 h1.2
  text "SDA" at 128,58.332 h1.2
  text "温度计" at 131.1,57.5 h2 r270
Top Solder:
  lines w5: 69.1,98.35 70.751,98.35 86.523,98.35 89.573,95.3 ; 97.154,95 115.655,95 118.73,98.075
Bottom Solder:
  lines w5: 69.1,91.15 70.751,91.15 118.454,91.15
Mechanical 1:
  lines w0.2: 54,55.6 134,55.6 ; 54,50.6 54,110.7 134,110.7 134,50.6 54,50.6
Mechanical 15:
  lines w0.15: 117.1,86.7 124.1,86.7
  lines w0.2: 80.4,66.9 107.5,66.9 107.5,93.9 80.4,93.9 80.4,66.9